# EAGLE board Grove - Sound Sensor v1 (EAGLE 7.2.0)
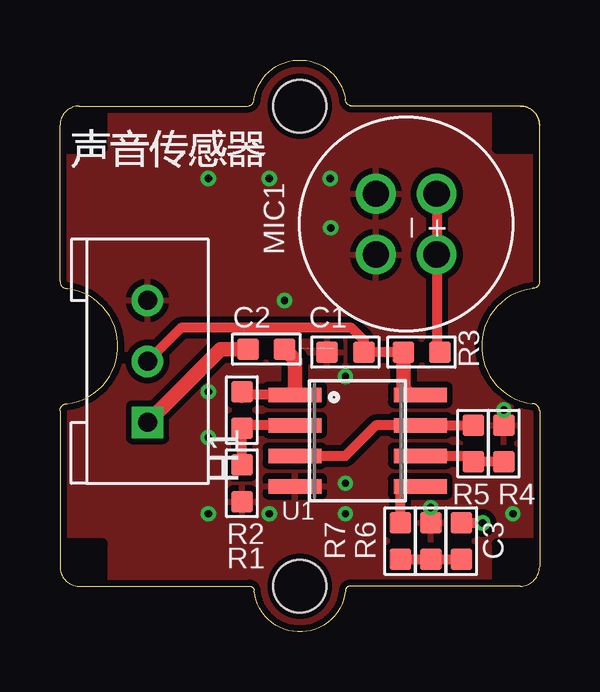
[diagram p0: board, top side]
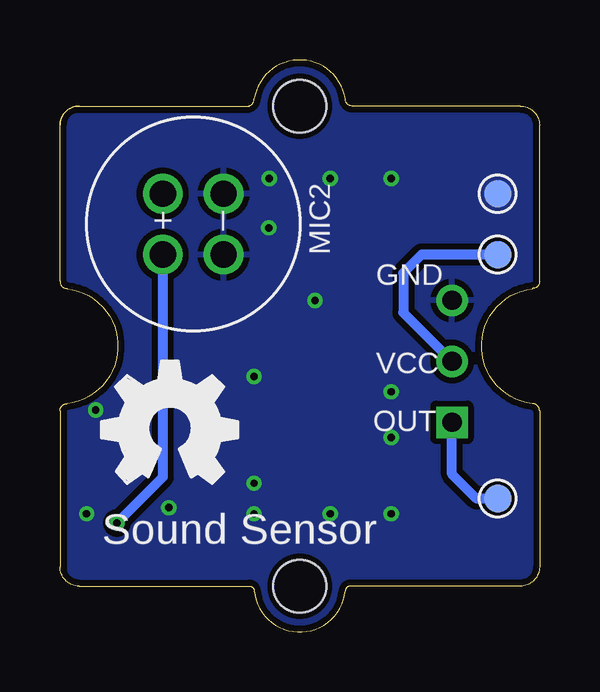
[diagram p1: board, bottom side, seen from below]

Size 20 x 23.83 mm. Coordinates in mm from the lower left corner, seen from the top.
Copper layers (1*16): Top 0.035mm / dielectric 1.5mm / Bottom 0.035mm
Design rules "SeeedStudio_rule_no_angle_090911 *": minimum track width 6mil, minimum drill 12mil, track to track 6mil, track to pad 6mil, pad to pad 6mil, via to via 6mil, smd to smd 0mil, copper to edge 10mil, drill to drill 10mil, minimum pad ring 10mil, minimum via ring 6mil, stop-mask expansion 2mil, vias tented up to drill 100mil, thermal gap 10mil
Net classes: 0 default: width 0.152 mm, drill 0.305 mm, clearance 0.152 mm

## Footprints (pad centres in the part's own frame; a part is rotated, then mirrored left to right if it is on the bottom)
C0603 = smd 0.889 x 0.889: 1 -0.762,0; 2 0.762,0
TP_4545 = smd 1.143 x 1.143: T 0,0
HEAD_LOCK = drill 0.8 square: 1 0,0 | drill 0.8: 2 2.54,0; 3 5.08,0
MICRO = drill 1.1: 1 -1.27,1.27; 2 -1.27,-1.27
R0603 = smd 0.889 x 0.889: 1 -0.762,0; 2 0.762,0
SO08 = smd 0.61 x 2.21: 1 -1.905,-2.616; 2 -0.635,-2.616; 3 0.635,-2.616; 4 1.905,-2.616; 5 1.905,2.616; 6 0.635,2.616; 7 -0.635,2.616; 8 -1.905,2.616
1U-DIM-W/-DRILL = hole 2.2: 0,-10; 0,10

## Placement (x,y rotation side)
C1  100nF  [C0603]  11.9,11.65 180 top
C2  220nF  [C0603]  8.6,11.78 180 top
C3  1uF  [C0603]  16.73,3.78 270 top
GND  [TP_4545]  1.74,18.26 0 bottom
H1  HEAD_LOCK  [HEAD_LOCK]  3.65,8.73 90 top
MIC1  MICRO  [MICRO]  14.45,16.99 270 top
MIC2  DNP  [MICRO]  14.45,16.99 90 bottom
OUT  [TP_4545]  1.74,5.56 0 bottom
R1  1K  [R0603]  7.59,6.19 270 top
R2  10K  [R0603]  7.59,9.24 270 top
R3  10K  [R0603]  15.08,11.65 180 top
R4  1K  [R0603]  18.51,7.84 90 top
R5  10K  [R0603]  17.24,7.84 270 top
R6  100K  [R0603]  15.46,3.78 90 top
R7  100K  [R0603]  14.19,3.78 90 top
U1  LM358DR  [SO08]  12.41,7.97 270 top
U$1  [OSHW_FILLX200_NOTEXT]  18.26,6.19 0 bottom
U$4  [1U-DIM-W/-DRILL]  10,11.91 0 top
VCC  [TP_4545]  1.74,15.72 0 bottom

## Library data of the parts
C1-C3 R1-R7 = Discrete
GND OUT VCC = Discrete; PARTNO: DNP
H1 = HEAD_LOCK
MIC1 MIC2 = seeedleo
U1 = IC
U$1 = Logo
U$4 = moudle

## Nets
GND: C1.2 GND.T H1.3 MIC1.2 MIC2.2 R1.2 R4.2 R6.2 U1.4
N$1: R7.2 U1.5
N$2: R4.1 R5.2 U1.6
N$3: C3.2 R6.1 R7.1
N$7: C3.1 MIC1.1 MIC2.1 R3.1
N$12: R5.1 U1.3 U1.7
N$16: R1.1 R2.2 U1.2
OUT: C2.2 H1.1 OUT.T
OUT1: C2.1 R2.1 U1.1
VCC: C1.1 H1.2 R3.2 U1.8 VCC.T

## Tracks (layer width: path | path; a pad name or v marks a point on that pad's centre or on a via)
GND  (via drill 0.3 pad 0.64)
  other vias: 18.51,9.24 6.19,8.1 11.9,6.19 11.9,4.92 11.3,16.84 9.37,13.81 6.19,4.92 15.46,5.18 6.19,10 6.19,18.89 11.27,18.89 8.73,18.89 8.73,4.92 11.9,10.64 18.89,4.92
  pour Top (isolate 0.254): -0.79,24.61 20.8,24.61 20.8,-0.79 -0.79,-0.79
  pour Bottom (isolate 0.254): -0.79,24.61 20.8,24.61 20.8,-0.79 -0.79,-0.79
N$1
  Top 0.406: R7.2 14.19,5.81 14.45,6.07 U1.5
N$2
  Top 0.406: U1.6 16.98,7.34 R5.2 R4.1
N$3
  Top 0.406: R7.1 R6.1 C3.2
N$7  (via drill 0.3 pad 0.64)
  Top 0.406: MIC1.1 MIC2.1 15.71,11.78 R3.1 | C3.1 v17.62,4.54
  Bottom 0.406: MIC2.1 15.71,6.45 v17.62,4.54
N$12
  Top 0.406: R5.1 U1.7 13.18,8.61 11.9,7.34 U1.3
N$16
  Top 0.406: U1.2 7.71,8.61 R2.2 R1.1
OUT
  Top 0.406: 3.83,8.91 H1.1
  Top 0.61: 3.83,8.91 6.7,11.78 C2.2
  Bottom 0.406: OUT.T 2.63,5.56 3.65,6.57 H1.1
OUT1
  Top 0.406: U1.1 7.71,9.88 R2.1 7.59,9.75
  Top 0.61: U1.1 9.8,11.35 C2.1
VCC
  Top 0.406: R3.2 C1.1 12.67,12.16 12.16,12.67 5.05,12.67 H1.2
  Top 0.61: R3.2 14.32,10.13 14.57,9.88 U1.8
  Bottom 0.406: VCC.T 4.92,15.72 5.68,14.96 5.68,13.31 H1.2

## Text on the board
tPlace: C:/Users/Xiangzi/Desktop/Ãû³Æ/Sound.bmp
bPlace: GND | VCC | OUT | Sound Sensor